# Altium PCB ESC_PCB.PcbDoc
Units mm, origin at the board's own origin, x right, y up, seen from the top; angles counter-clockwise.
Board outline 52 x 30 mm, 4 copper layers (Top Layer, Layer 1, Layer 2, Bottom Layer), stack 0.603 mm thick; 62 components, 56 nets, 202 pads, 153 vias.
Unrouted connection lines stored in the file: 4.
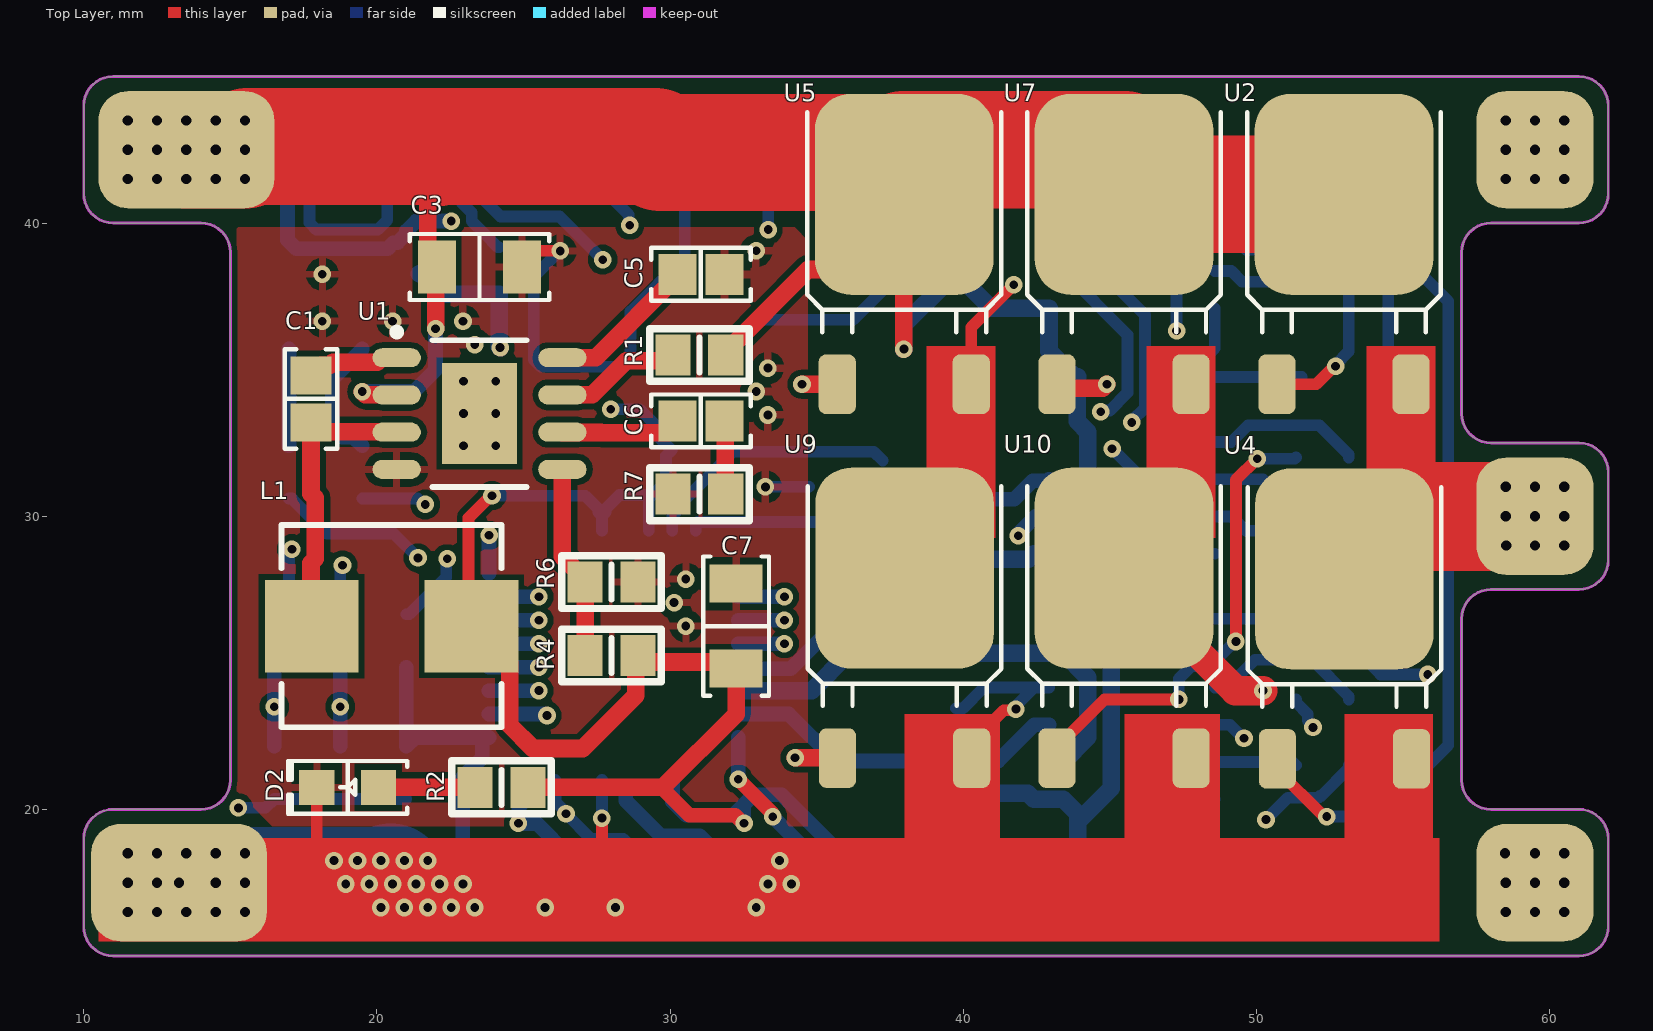
[diagram p0: Top Layer view]
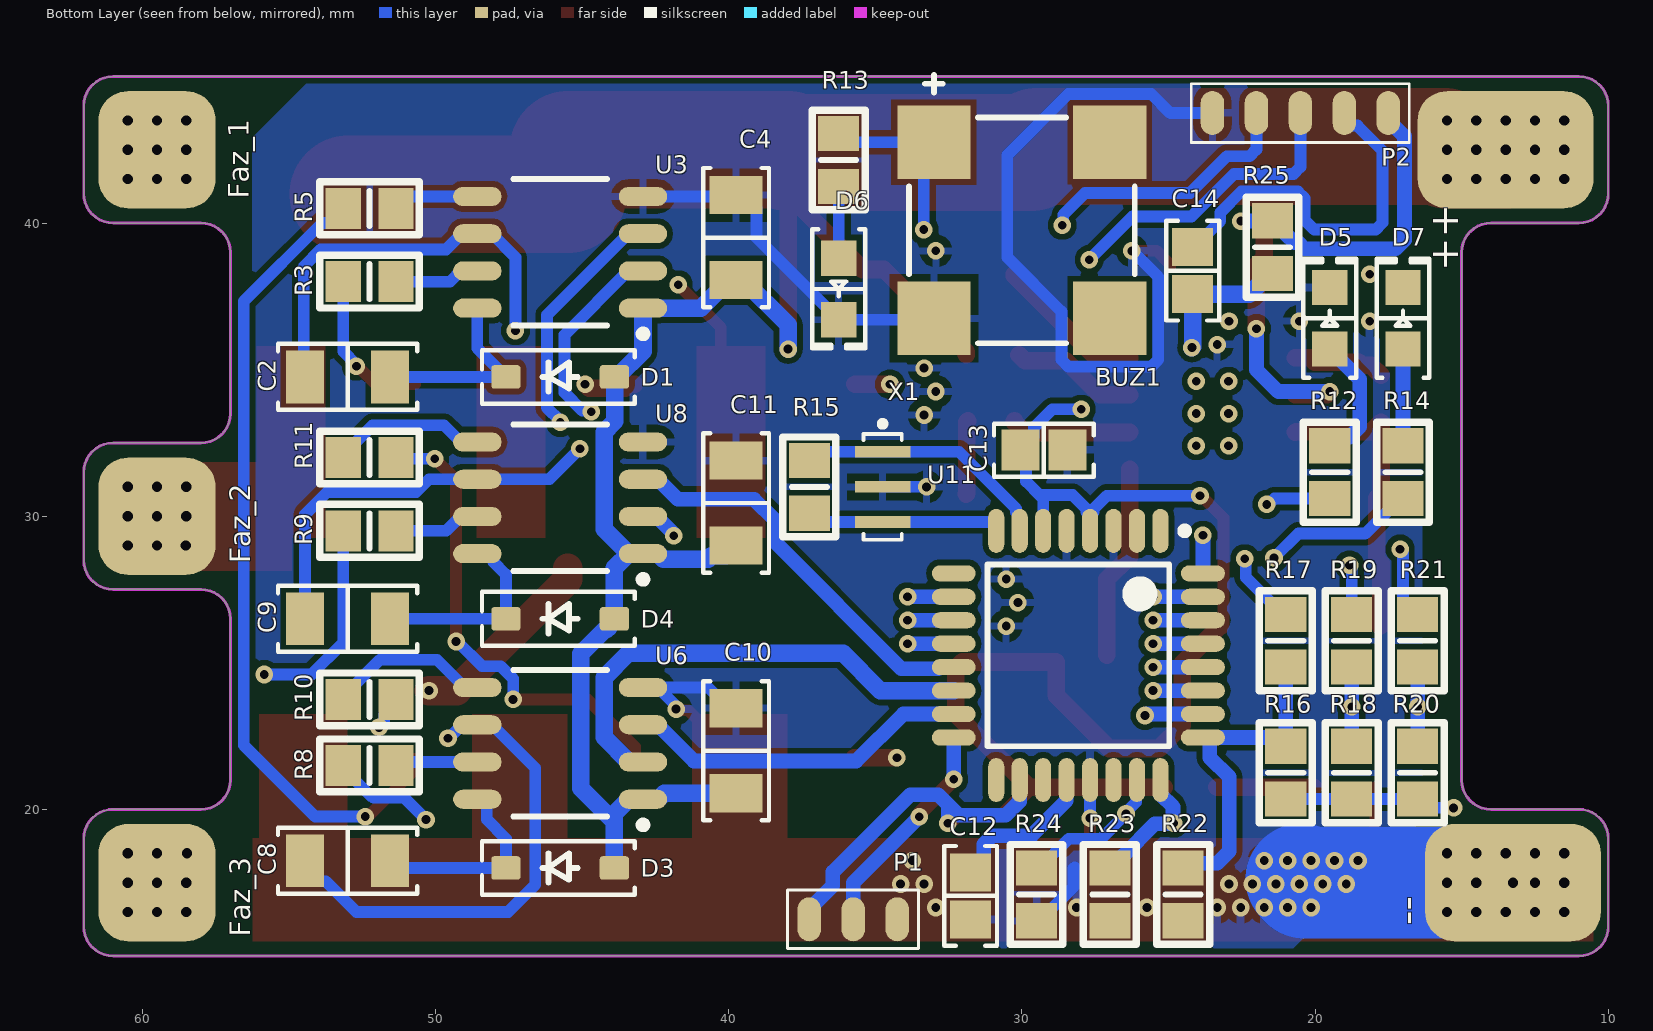
[diagram p1: Bottom Layer view, seen from below]
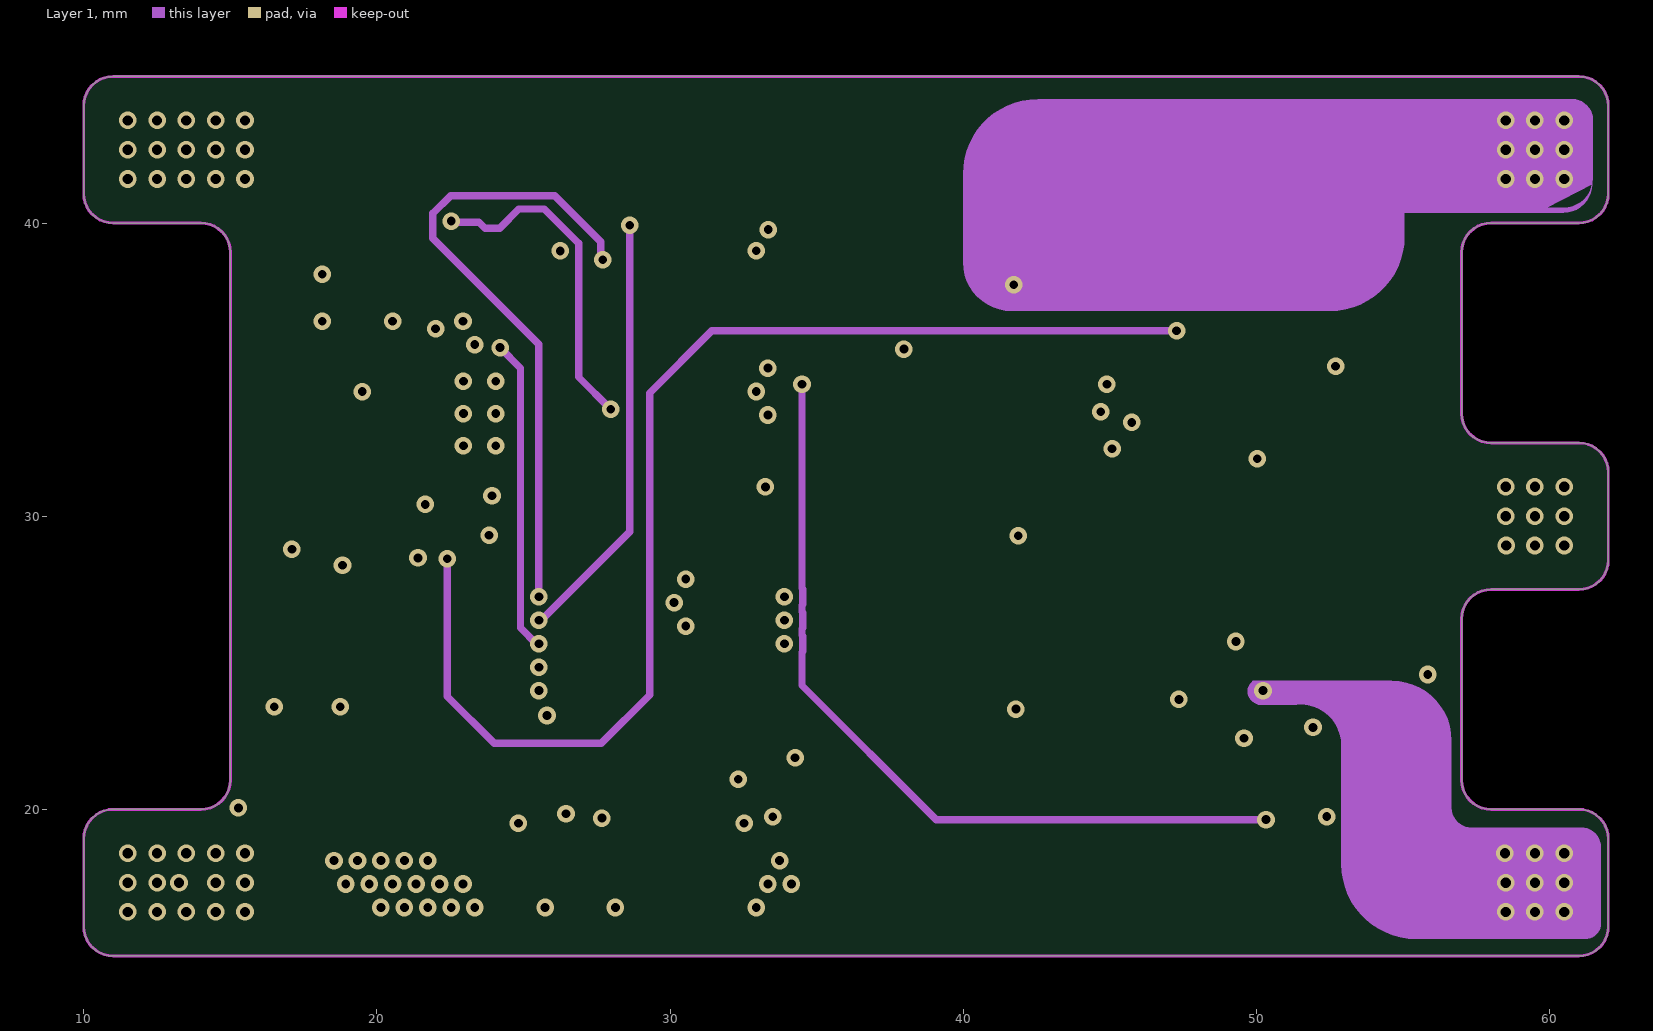
[diagram p2: Layer 1]
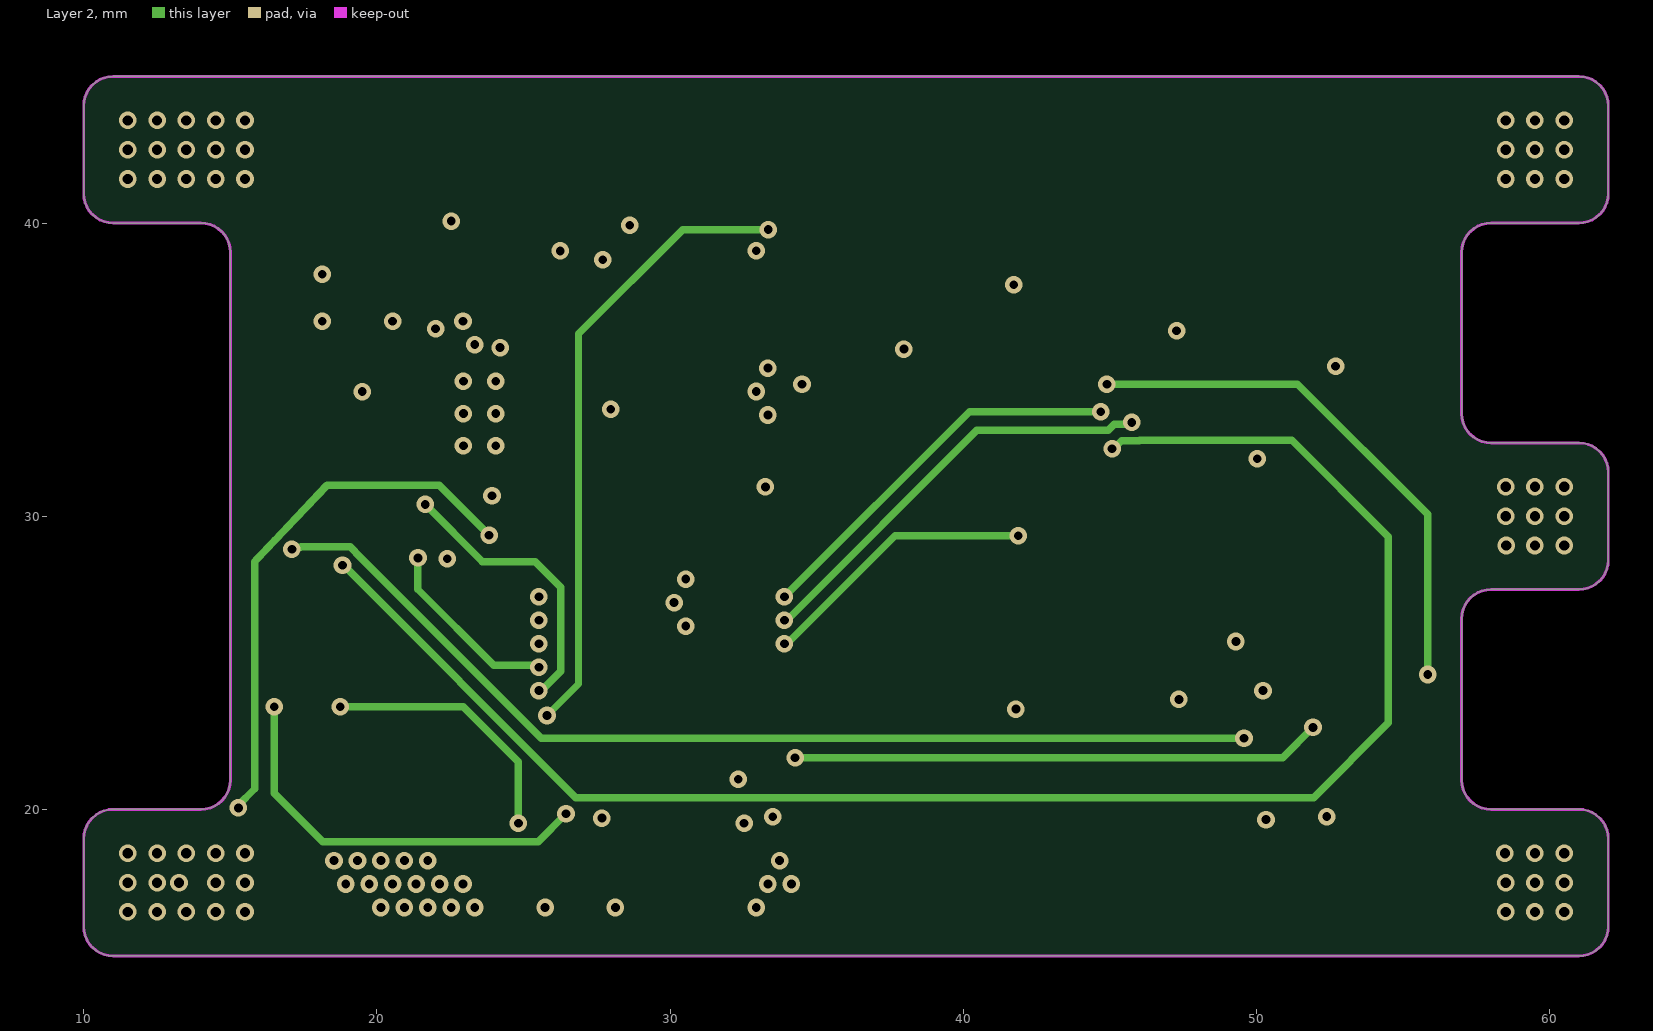
[diagram p3: Layer 2]
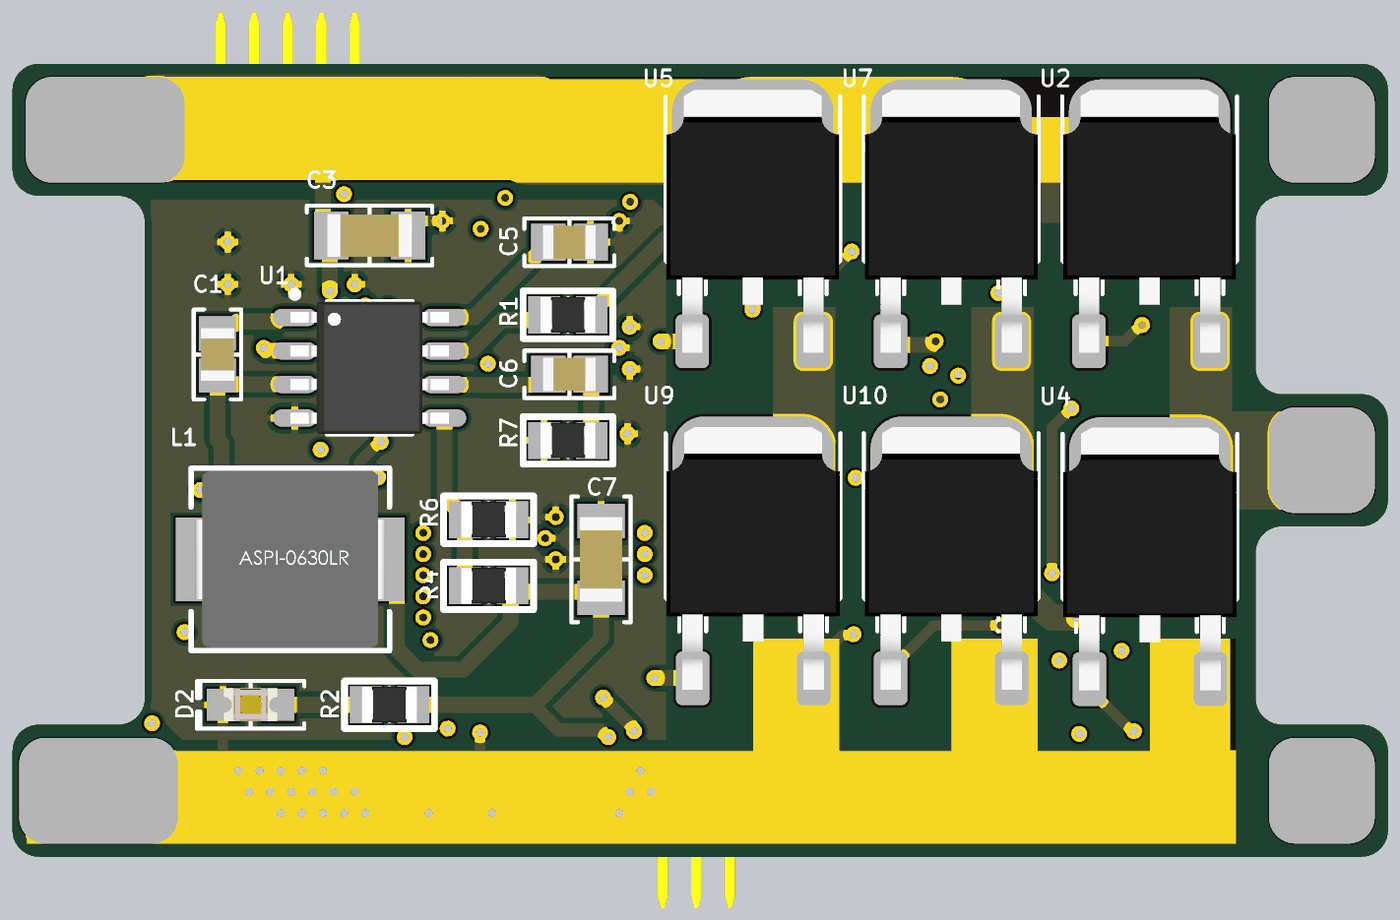
[diagram p4: 3D render of the assembled board from above, using the file's embedded part models]
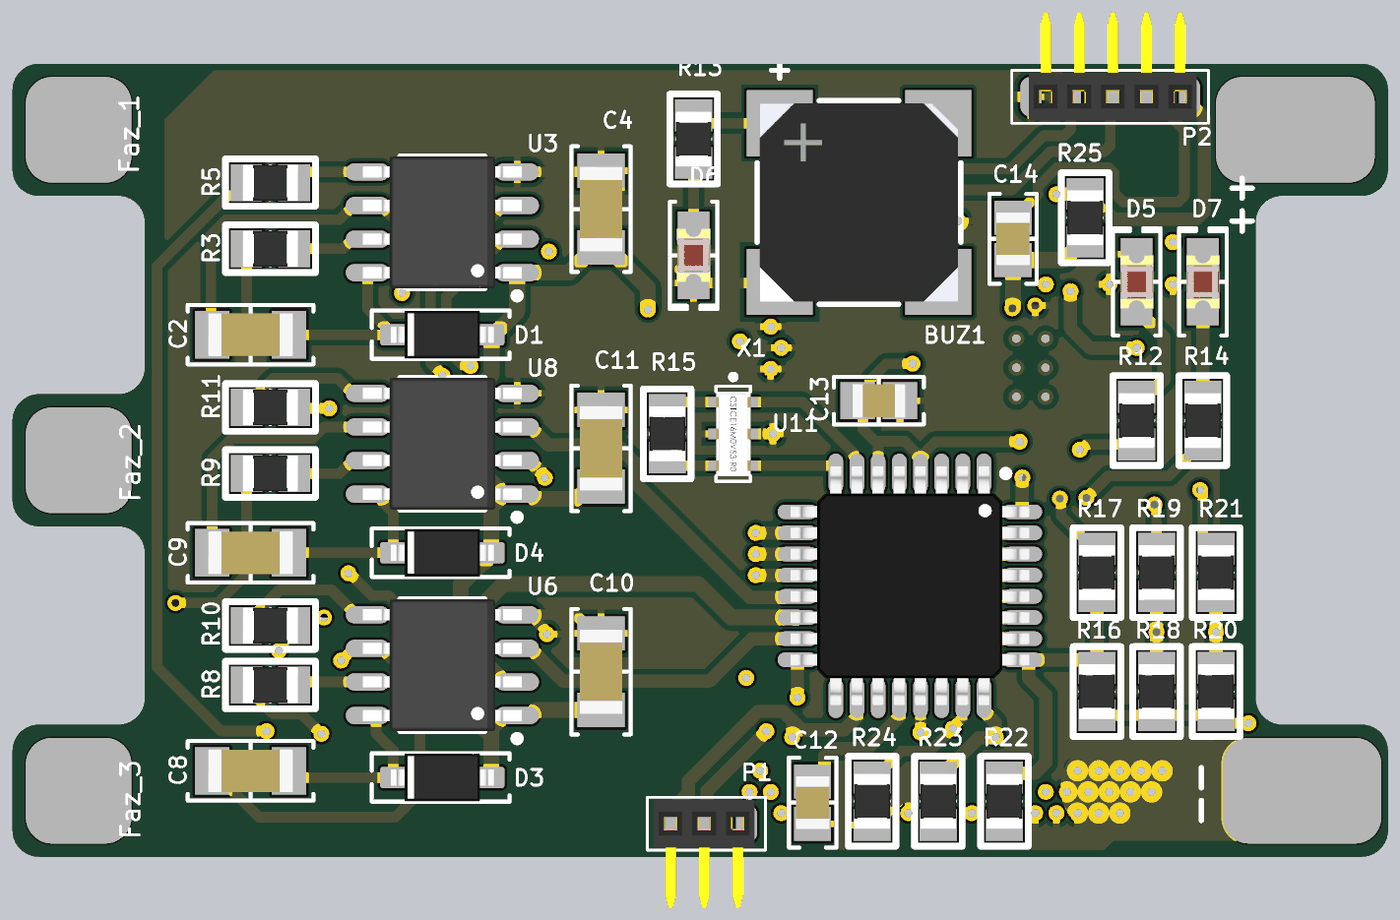
[diagram p5: 3D render of the assembled board from below, using the file's embedded part models]

## Layer stack, top to bottom
Top Solder: solder mask 0.0102, Solder Resist, Dk 3.5
Top Layer: signal copper 0.0356
Dielectric 2: prepreg 0.0711, PP-006, Dk 4.1
Layer 1: signal copper 0.035
Dielectric 1: dielectric 0.32, FR-4, Dk 4.8
Layer 2: signal copper 0.035
Dielectric 3: prepreg 0.0711, PP-006, Dk 4.1
Bottom Layer: signal copper 0.0356
Bottom Solder: solder mask 0.0102, Solder Resist, Dk 3.5

## Board outline
10,16 10,19 cw(c11,19) 11,20 14,20 ccw(c14,21) 15,21 15,39 ccw(c14,39) 14,40 11,40 cw(c11,41) 10,41 10,44 cw(c11,44) 11,45 61,45 cw(c61,44) 62,44 62,41 cw(c61,41) 61,40 58,40 ccw(c58,39) 57,39 57,33.5 ccw(c58,33.5) 58,32.5 61,32.5 cw(c61,31.5) 62,31.5 62,28.5 cw(c61,28.5) 61,27.5 58,27.5 ccw(c58,26.5) 57,26.5 57,21 ccw(c58,21) 58,20 61,20 cw(c61,19) 62,19 62,16 cw(c61,16) 61,15 11,15 cw(c11,16)

## Design rules (kind name [scope] priority, off if disabled: settings)
Clearance [All] p1: gap=0.2 ignorepadtopadclearanceinfootprint=FALSE
PolygonConnect [All] p1: connectstyle=Relief reliefconductorwidth=0.254 reliefentries=4 polygonreliefangle="90 Angle" airgapwidth=0.254
RoutingVias [All] p1: holewidth=0.3 width=0.6 viastyle="Through Hole" minholewidth=0.25 minwidth=0.5 maxholewidth=2.5 maxwidth=5
SolderMaskExpansion [All] p1: expansion=0.102 istentingtop=FALSE
Width [All] p1: maxlimit=10 minlimit=0.1 preferedwidth=0.3 midlayer1_minwidth=0.254 midlayer1_maxwidth=0.254 midlayer1_prefwidth=0.254 midlayer2_minwidth=0.254 midlayer2_maxwidth=0.254 midlayer2_prefwidth=0.254 minimp=50.000000 maximp=50.000000 favimp=50.000000
30 further rules are at their usual default settings.

## Classes and differential pairs
component class Power: C1 C2 C3 C4 C5 C6 C7 C8 C9 C10 C11 D1 D2 D3 D4 L1 R1 R2 R3 R4 R5 R6 R7 R8 R9 R10 R11 U1 U2 U3 U4 U5 U6 U7 U8 U9 U10
component class MCU: BUZ1 C12 C13 C14 D5 D6 D7 P1 P2 R12 R13 R14 R15 R16 R17 R18 R19 R20 R21 R22 R23 R24 R25 U11 X1

## Components (designator, comment, footprint, x,y, rotation, side; value= is the part's Value field where it differs from the comment)
BUZ1 "BUZZER MAGN 3.6V 7.5X7.5MM SMD" "BUZ: CMT-7525" 30,39.75 r270 bottom
C1 "CAP CER 10000PF 50V X7R 0805" "CAP 0805/2012" 17.75,34 r270 top
C2 "CAP CER 2.2UF 50V X5R 1206" "CAP 1206/3216" 53,34.75 r0 bottom
C3 "CAP CER 10UF 50V X5R 1206" "CAP 1206/3216" 23.5,38.5 r180 top
C4 "CAP CER 10UF 50V X5R 1206" "CAP 1206/3216" 39.75,39.5 r270 bottom
C5 "CAP CER 0.1UF 50V X7R 0805" "CAP 0805/2012" 31.052,38.25 r180 top
C6 "CAP CER 3900PF 50V X7R 0805" "CAP 0805/2012" 31.052,33.25 r180 top
C7 "CAP CERAMIC 22UF 16V X7S 20% PAD" "CAP 1206/3216" 32.25,26.25 r270 top
C8 "CAP CER 2.2UF 50V X5R 1206" "CAP 1206/3216" 53,18.25 r0 bottom
C9 "CAP CER 2.2UF 50V X5R 1206" "CAP 1206/3216" 53,26.5 r0 bottom
C10 "CAP CER 10UF 50V X5R 1206" "CAP 1206/3216" 39.75,22 r270 bottom
C11 "CAP CER 10UF 50V X5R 1206" "CAP 1206/3216" 39.75,30.45 r270 bottom
C12 "CAP CER 0.1UF 50V X7R 0805" "CAP 0805/2012" 31.75,17.048 r90 bottom
C13 "CAP CER 0.1UF 50V X7R 0805" "CAP 0805/2012" 29.25,32.25 r0 bottom
C14 "CAP CER 0.1UF 50V X7R 0805" "CAP 0805/2012" 24.175,38.375 r270 bottom
D1 "1N4148 Diyot" SOD-123 45.75,34.75 r0 bottom
D2 "Red 645nm LED Indication - Discrete 1.8V 0805" "SMD: LED 0805/2012 RED" 19,20.75 r180 top
D3 "1N4148 Diyot" SOD-123 45.75,18 r0 bottom
D4 "1N4148 Diyot" SOD-123 45.75,26.5 r0 bottom
D5 "Red 645nm LED Indication - Discrete 1.8V 0805" "SMD: LED 0805/2012 RED" 19.5,36.75 r90 bottom
D6 "Red 645nm LED Indication - Discrete 1.8V 0805" "SMD: LED 0805/2012 RED" 36.25,37.75 r270 bottom
D7 "Red 645nm LED Indication - Discrete 1.8V 0805" "SMD: LED 0805/2012 RED" 17,36.75 r90 bottom
L1 "FIXED IND 10UH 4A 68 MOHM SMD" ASPI-0630LR-100M-T15 20.5,26.25 r0 top
P1 "WR-PHD 2.54 mm Angled Socket Header" PWM_CONN 35.75,16.25 r180 bottom
P2 "WR-PHD 2.54 mm Angled Socket Header" TTL_CONN_5 20.5,43.75 r0 bottom
R1 "RES SMD 100K OHM 1% 1/8W 0805" RES_0805 31,35.5 r0 top
R2 "RES SMD 100 OHM 1% 1/8W 0805" RES_0805 24.25,20.75 r180 top
R3 "RES SMD 100 OHM 1% 1/8W 0805" RES_0805 52.25,38 r0 bottom
R4 "RES SMD 44.2K OHM 1% 1/8W 0805" RES_0805 28,25.25 r0 top
R5 "RES SMD 100 OHM 1% 1/8W 0805" RES_0805 52.25,40.5 r0 bottom
R6 "RES SMD 10K OHM 1% 1/8W 0805" RES_0805 28,27.75 r180 top
R7 "RES SMD 6.8K OHM 1% 1/8W 0805" RES_0805 31,30.75 r0 top
R8 "RES SMD 100 OHM 1% 1/8W 0805" RES_0805 52.25,21.5 r0 bottom
R9 "RES SMD 100 OHM 1% 1/8W 0805" RES_0805 52.25,29.5 r0 bottom
R10 "RES SMD 100 OHM 1% 1/8W 0805" RES_0805 52.25,23.75 r180 bottom
R11 "RES SMD 100 OHM 1% 1/8W 0805" RES_0805 52.25,32 r180 bottom
R12 "RES SMD 100 OHM 1% 1/8W 0805" RES_0805 19.5,31.5 r90 bottom
R13 "RES SMD 100 OHM 1% 1/8W 0805" RES_0805 36.25,42.15 r90 bottom
R14 "RES SMD 100 OHM 1% 1/8W 0805" RES_0805 17,31.5 r90 bottom
R15 "RES SMD 10K OHM 1% 1/8W 0805" RES_0805 37.25,31 r270 bottom
R16 "RES SMD 33K OHM 1% 1/8W 0805" RES_0805 21,21.25 r90 bottom
R17 "RES SMD 33K OHM 1% 1/8W 0805" RES_0805 21,25.75 r90 bottom
R18 "RES SMD 33K OHM 1% 1/8W 0805" RES_0805 18.75,21.25 r90 bottom
R19 "RES SMD 33K OHM 1% 1/8W 0805" RES_0805 18.75,25.75 r90 bottom
R20 "RES SMD 33K OHM 1% 1/8W 0805" RES_0805 16.5,21.25 r90 bottom
R21 "RES SMD 33K OHM 1% 1/8W 0805" RES_0805 16.5,25.75 r90 bottom
R22 "RES SMD 10K OHM 1% 1/8W 0805" RES_0805 24.5,17.1 r90 bottom
R23 "RES SMD 10K OHM 1% 1/8W 0805" RES_0805 27,17.1 r90 bottom
R24 "RES SMD 10K OHM 1% 1/8W 0805" RES_0805 29.5,17.1 r90 bottom
R25 "RES SMD 10K OHM 1% 1/8W 0805" RES_0805 21.45,39.175 r90 bottom
U1 "IC REG BUCK ADJUSTABLE 3A 8SOIC" SOIC8_PAD 23.5,33.5 r0 top
U2 "MOSFET N-CH 30V 161A DPAK" DPAK 53,38.5 r90 top
U3 "IC GATE DRVR HALF-BRIDGE 8SOIC" SOIC8 45.75,39 r0 bottom
U4 "MOSFET N-CH 30V 161A DPAK" DPAK 53.014,25.723 r90 top
U5 "MOSFET N-CH 30V 161A DPAK" DPAK 38,38.5 r90 top
U6 "IC GATE DRVR HALF-BRIDGE 8SOIC" SOIC8 45.75,22.25 r0 bottom
U7 "MOSFET N-CH 30V 161A DPAK" DPAK 45.5,38.5 r90 top
U8 "IC GATE DRVR HALF-BRIDGE 8SOIC" SOIC8 45.75,30.625 r0 bottom
U9 "MOSFET N-CH 30V 161A DPAK" DPAK 38.014,25.75 r90 top
U10 "MOSFET N-CH 30V 161A DPAK" DPAK 45.5,25.75 r90 top
U11 "IC MCU 8BIT 32KB FLASH 32TQFP" TQFP32 28.075,25.25 r270 bottom
X1 "CERAMIC RES 16.0000MHZ 15PF SMD" CRYSTAL_16MHZ(CTSE16) 34.75,31 r270 bottom

## Footprints (in the part's own frame and the unit in brackets; to place one, negate y for a bottom-side part, rotate by r counter-clockwise, add the part's x,y. Pads: shape width x height; smd on the part's side, far side on the other; paste and mask are expansions set on the pad)
ASPI-0630LR-100M-T15 [mm]
  rect 3.2x3.15 smd: 1(-2.725,0) 2(2.725,0)
  silkscreen extent -3.75,-3.45 3.75,3.45, body extent -3.6,-3.32 3.6,3.33, height 3
"BUZ: CMT-7525" [mm]
  rect 2.5x2.5 smd: 0(-3,3) 0(3,3) 1(-3,-3) 2(3,-3)
  silkscreen extent -5.3,-3.85 3.85,3.85, body extent -3.75,-3.75 3.75,3.75, height 2.5
"CAP 0805/2012" [mm] "Chip Capacitor, 2-Leads, Body 2.00x1.20mm, IPC Medium Density"
  rect 1.3x1.4 smd: 1(-0.8,0) 2(0.8,0)
  silkscreen extent -1.7,-0.9 1.7,0.9, body extent -1,-0.64 1,0.64, height 1.26
"CAP 1206/3216" [mm] "Chip Capacitor, 2-Leads, Body 3.25x1.60mm, IPC Medium Density"
  rect 1.3x1.8 smd: 1(-1.45,0) 2(1.45,0)
  silkscreen extent -2.37,-1.12 2.37,1.12, body extent -1.6,-0.81 1.6,0.81, height 1.62
CRYSTAL_16MHZ(CTSE16) [mm]
  rect 0.4x1.9 smd: 1(-1.2,0) 2(0,0) 3(1.2,0)
  silkscreen extent -2.25,-0.65 1.8,0.65, body extent -1.6,-0.65 1.6,0.65, height 0.9
DPAK [mil] "D-PAK, 3-Pads, Body 6,47x6,54mm (max), IPC Medium Density"
  rrect40% 80x50 smd: 1(-157.48,90.55) 3(-157.48,-89.45)
  rrect40% 270x240 smd: 4(97.52,0.55)
  silkscreen extent -87,-129 208,131, body extent -174,-128 217,129, height 91
PWM_CONN [mm]
  oval 0.8x1.5 smd: 1(-1.5,0) 2(0,0) 3(1.5,0)
  silkscreen extent -2.25,-1 2.22,1, body extent -2.01,-3.2 1.8,0.9, height 4.72
RES_0805 [mm]
  rect 1.2x1.4 smd: 1(-0.9,0) 2(0.9,0)
  silkscreen extent -1.7,-0.9 1.7,0.9, body extent -1.05,-0.68 1.05,0.68, height 0.6
"SMD: LED 0805/2012 RED" [mm] "Chip Diode, 2-Leads, Body 2.00x1.25mm, IPC Medium Density"
  rect 1.2x1.2 smd: 1(-1.05,0) 2(1.05,0)
  silkscreen extent -2.03,-0.9 2.03,0.9, body extent -1,-0.62 1,0.63, height 0.9
SOD-123 [mm] "SOD, 2-Leads, Body 1.55x3.70mm, IPC Medium Density"
  rrect25% 1x0.8 smd: 1(-1.85,0) 2(1.85,0)
  silkscreen extent -2.54,-0.92 2.67,0.92, body extent -1.95,-0.9 1.95,0.9, height 1.18
SOIC8 [mm] "SOIC, 8-Leads, Body 4,90x3,90mm, Pitch 1,27mm, Thermal Pad 3,45x2,56mm, IPC Low Density"
  oval 1.65x0.65 smd: 1(-2.825,1.905) 2(-2.825,0.635) 3(-2.825,-0.635) 4(-2.825,-1.905) 5(2.825,-1.905) 6(2.825,-0.635) 7(2.825,0.635) 8(2.825,1.905)
  silkscreen extent -2.95,-2.5 1.6,2.9, body extent -3,-2.5 3,2.5, height 1.7
SOIC8_PAD [mm] "SOIC, 8-Leads, Body 4,90x3,90mm, Pitch 1,27mm, Thermal Pad 3,45x2,56mm, IPC Low Density"
  oval 1.65x0.65 smd: 1(-2.825,1.905) 2(-2.825,0.635) 3(-2.825,-0.635) 4(-2.825,-1.905) 5(2.825,-1.905) 6(2.825,-0.635) 7(2.825,0.635) 8(2.825,1.905)
  rect 2.56x3.45 smd: 9(0,0)
  silkscreen extent -2.95,-2.5 1.6,2.9, body extent -3,-2.5 3,2.5, height 1.7
TQFP32 [mm] "TQFP, 32-Leads, Body 7,00x7,00mm, Pitch 0,80mm, IPC Medium Density"
  oval 1.5x0.55 smd: 1(-4.25,2.8) 2(-4.25,2) 3(-4.25,1.2) 4(-4.25,0.4) 5(-4.25,-0.4) 6(-4.25,-1.2) 7(-4.25,-2) 8(-4.25,-2.8) 17(4.25,-2.8) 18(4.25,-2) 19(4.25,-1.2) 20(4.25,-0.4) 21(4.25,0.4) 22(4.25,1.2) 23(4.25,2) 24(4.25,2.8)
  oval 0.55x1.5 smd: 9(-2.8,-4.25) 10(-2,-4.25) 11(-1.2,-4.25) 12(-0.4,-4.25) 13(0.4,-4.25) 14(1.2,-4.25) 15(2,-4.25) 16(2.8,-4.25) 25(2.8,4.25) 26(2,4.25) 27(1.2,4.25) 28(0.4,4.25) 29(-0.4,4.25) 30(-1.2,4.25) 31(-2,4.25) 32(-2.8,4.25)
  silkscreen extent -4.37,-3.1 3.1,3.75, body extent -4.51,-4.51 4.51,4.51, height 1
TTL_CONN_5 [mm]
  oval 0.8x1.5 smd: 1(-3,0) 2(-1.5,0) 3(0,0) 4(1.5,0) 5(3,0)
  silkscreen extent -3.71,-1 3.72,1, body extent -3.28,-3.2 3.07,0.9, height 4.72

## Part data
BUZ1: library part Buzzer(CMT-7525-80-SMT-TR), "Buzzers Transducer, Externally Driven Magnetic 3.6V 100mA 2.73kHz 80dB @ 3.6V, 10cm Surface Mount Solder Pads", +Sicaklik=+85, -Sicaklik=-40, Cins=Buzzer, Deger=Buzzer, Kılıf=Nonstandard, Lehim Yöntemi=SMD, MSL="1 (Unlimited)", Uretici Kodu=CMT-7525-80-SMT-TR
C1: library part "10nF 50V 0805", "10000pF ±10% 50V Ceramic Capacitor X7R 0805 (2012 Metric)", +Sicaklik=+125, -Sicaklik=-55, Cins=Kondansator, Deger="10nF 50V", Kılıf=0805, Lehim Yöntemi=SMD, MSL="1 (Unlimited)", Uretici Kodu=CL21B103KBANNNC
C2 C8 C9: library part "2.2uF 50V 1206", "2.2µF ±10% 50V Ceramic Capacitor X5R 1206 (3216 Metric)", +Sicaklik=+85, -Sicaklik=-55, Cins=Kondansator, Deger="2.2uF 50V", Kılıf=1206, Lehim Yöntemi=SMD, MSL="1 (Unlimited)", Uretici Kodu=CL31A225KBHNNNE
C3 C4 C10 C11: library part "10uF 50V 1206", "10µF ±10% 50V Ceramic Capacitor X5R 1206 (3216 Metric)", +Sicaklik=+125, -Sicaklik=-55, Cins=Kondansator, Deger="10uF 50V", Kılıf=1206, Lehim Yöntemi=SMD, MSL="1 (Unlimited)", Uretici Kodu=CL31A106KBHNNNE
C5 C12 C13 C14: library part "100nF 50V 0805", "0.1µF ±10% 50V Ceramic Capacitor X7R 0805 (2012 Metric)", +Sicaklik=+125, -Sicaklik=-55, Cins=Kondansator, Deger="100nF 50V", Kılıf=0805, Lehim Yöntemi=SMD, MSL="1 (Unlimited)", Uretici Kodu=CL21B104KBCNNNC
C6: library part "3.9nF 50V 0805", "3900pF ±10% 50V Ceramic Capacitor X7R 0805 (2012 Metric)", +Sicaklik=+125, -Sicaklik=-55, Cins=Kondansator, Deger="3.9nF 50V", Kılıf=0805, Lehim Yöntemi=SMD, MSL="1 (Unlimited)", Uretici Kodu=CL21B392KBANNNC
C7: library part "22uF 16V 1206", "22µF ±20% 16V Ceramic Capacitor X7S 1206 (3216 Metric)", +Sicaklik=+125, -Sicaklik=-55, Cins=Kondansator, Deger="22uF 16V", Kılıf=1206, Lehim Yöntemi=SMD, MSL="1 (Unlimited)", Uretici Kodu=GRM31CC71C226ME11L
D1 D3 D4: library part 1N4148, "DIODE GEN PURP 100V 150MA SOD123", +Sicaklik=+150, -Sicaklik=-65, Cins=Diyot, Deger=1N4148, Kılıf=SOD123, Lehim Yöntemi=SMD, MSL="1 (Unlimited)", Uretici Kodu=1N4148W-TP
D2 D5 D6 D7: library part LED_Kırmızı, "LED RED DIFFUSED 0805 SMD", +Sicaklik=+125, -Sicaklik=-40, Cins=LED, Deger="KIRMIZI LED", Kılıf=0805, Lehim Yöntemi=SMD, MSL="1 (Unlimited)", Uretici Kodu="LH R974-LP-1"
L1: library part "10uH 4A", "10µH Shielded Molded Inductor 4A 68mOhm Max Nonstandard", +Sicaklik=+125, -Sicaklik=-55, Cins=Bobin, Deger="10uH 4A", Kılıf=Nonstandard, Lehim Yöntemi=SMD, MSL="1 (Unlimited)", Uretici Kodu=ASPI-0630LR-100M-T15
P1: library part HDR(1X3), +Sicaklik=+105, -Sicaklik=-40, Cins=Konnektor, Kılıf="3POS 2.54MM", Lehim Yöntemi=MANUEL, MSL="1 (Unlimited)", Uretici Kodu=613003143121
P2: library part HDR(1X5), +Sicaklik=+105, -Sicaklik=-40, Cins=Konnektor, Kılıf="5POS 2.54MM", Lehim Yöntemi=MANUEL, MSL="1 (Unlimited)", Uretici Kodu=613005143121
R1: library part "100K 0805", "100 kOhms ±1% 0.125W, 1/8W Chip Resistor 0805 (2012 Metric) Moisture Resistant Thick Film", +Sicaklik=+155, -Sicaklik=-55, Cins=Direnc, Deger=100K, Kılıf=0805, Lehim Yöntemi=SMD, MSL="1 (Unlimited)", Uretici Kodu=RC0805FR-07100KL
R2 R3 R5 R8 R9 R10 R11 R12 R13 R14: library part "100R 0805", "100 Ohms ±1% 0.125W, 1/8W Chip Resistor 0805 (2012 Metric) Moisture Resistant Thick Film", +Sicaklik=+155, -Sicaklik=-55, Cins=Direnc, Deger=100R, Kılıf=0805, Lehim Yöntemi=SMD, MSL="1 (Unlimited)", Uretici Kodu=RC0805FR-07100RL
R4: library part "44.2K 0805", "44.2 kOhms ±1% 0.125W, 1/8W Chip Resistor 0805 (2012 Metric) Moisture Resistant Thick Film", +Sicaklik=+155, -Sicaklik=-55, Cins=Direnc, Deger=44.2K, Kılıf=0805, Lehim Yöntemi=SMD, MSL="1 (Unlimited)", Uretici Kodu=RC0805FR-0744K2L
R6 R15 R22 R23 R24 R25: library part "10K 0805", "10 kOhms ±1% 0.125W, 1/8W Chip Resistor 0805 (2012 Metric) Moisture Resistant Thick Film", +Sicaklik=+155, -Sicaklik=-55, Cins=Direnc, Deger=10K, Kılıf=0805, Lehim Yöntemi=SMD, MSL="1 (Unlimited)", Uretici Kodu=RC0805FR-0710KL
R7: library part "6.8K 0805", "6.8 kOhms ±1% 0.125W, 1/8W Chip Resistor 0805 (2012 Metric) Moisture Resistant Thick Film", +Sicaklik=+155, -Sicaklik=-55, Cins=Direnc, Deger=6.8K, Kılıf=0805, Lehim Yöntemi=SMD, MSL="1 (Unlimited)", Uretici Kodu=RC0805FR-076K8L
R16 R17 R18 R19 R20 R21: library part "33K 0805", "33 kOhms ±1% 0.125W, 1/8W Chip Resistor 0805 (2012 Metric) Moisture Resistant Thick Film", +Sicaklik=+155, -Sicaklik=-55, Cins=Direnc, Deger=33K, Kılıf=0805, Lehim Yöntemi=SMD, MSL="1 (Unlimited)", Uretici Kodu=RC0805FR-0733KL
U1: library part MP2307DN, "Buck Switching Regulator IC Positive Adjustable 0.925V 1 Output 3A 8-SOIC (0.154\", 3.90mm Width) Exposed Pad", +Sicaklik=+85, -Sicaklik=-40, Cins=IC, Deger=MP2307DN, Kılıf=8-SOIC, Lehim Yöntemi=SMD, MSL="2A (4 Weeks)", Uretici Kodu=MP2307DN-LF-Z
U2 U4 U5 U7 U9 U10: library part IRLR7843, "N-Channel 30V 161A (Tc) 140W (Tc) Surface Mount D-Pak", +Sicaklik=+175, -Sicaklik=-55, Cins=MOSFET, Deger=IRLR7843TRPBF, Kılıf=DPAK(TO-252-3), Lehim Yöntemi=SMD, MSL="1 (Unlimited)", Uretici Kodu=IRLR7843TRPBF
U3 U6 U8: library part IR2101, "Half-Bridge Gate Driver IC Non-Inverting 8-SOIC", +Sicaklik=+150, -Sicaklik=-40, Cins=IC, Deger=IR2101STRPBF, Kılıf=8-SOIC, Lehim Yöntemi=SMD, MSL="2A (4 Weeks)", Uretici Kodu=IR2101STRPBF
U11: library part ATMEGA328P, "AVR AVR® ATmega Microcontroller IC 8-Bit 20MHz 32KB (16K x 16) FLASH 32-TQFP (7x7)", +Sicaklik=+85, -Sicaklik=-40, Cins=IC, Deger=ATMEGA328P, Kılıf=32-TQFP, Lehim Yöntemi=SMD, MSL="3 (168 Hours)", Uretici Kodu=RC0805FR-07100RL
X1: library part "CRYSTAL 16.0000MHZ(CSTCE16M0V53-R0)", "16MHz Ceramic Resonator Built in Capacitor 15pF ±0.3%  -20°C ~ 80°C Surface Mount", +Sicaklik=+80, -Sicaklik=-20, Cins=Kristal, Deger="16 MHZ 15PF", Kılıf=3-SMD, Lehim Yöntemi=SMD, MSL="1 (Unlimited)", Uretici Kodu=CSTCE16M0V53-R0

## Free pads (board coordinates)
  rrect50% 6x4 smd mask+0.05: ""(13.25,17.5) ""(13.5,42.5)
  rrect50% 6x4 smd far side mask+0.05: ""(13.25,17.5) ""(13.5,42.5)
  rrect50% 4x4 smd mask+0.05: ""(59.5,17.5) ""(59.5,30) ""(59.5,42.5)
  rrect50% 4x4 smd far side mask+0.05: ""(59.5,17.5) ""(59.5,30) ""(59.5,42.5)

## Via types
v1: diameter 0.6, hole 0.3, Top Layer to Bottom Layer, 89 vias
v2: diameter 0.6/0.6/0.6/0.6 (per signal layer), hole 0.35, Top Layer to Bottom Layer, 57 vias
v3: diameter 0.6, hole 0.3, Top Layer to Bottom Layer, tented both sides, 6 vias
v4: diameter 0.6/0.6/0.6/0.6 (per signal layer), hole 0.3, Top Layer to Bottom Layer, 1 vias

## Nets (pads, with @x,y where several pads share a name; then routed paths per layer and width w, separated by ;. In a path a pad name is that pad's centre, name@x,y a point inside that pad or via, vN(x,y) a via of type N, cw(c..) or ccw(c..) an arc to the next point about the centre after c; other vN are vias at no path point)
+5V: C7.2 C13.2 L1.2 P1.1 P2.1 R2.1 R4.2 R25.2 U11.4 U11.6 U11.18 | length 77.7
  Top Layer w0.4: L1.2 23.125,26.35 23.125,29.944 23.881,30.7 v1(23.925,30.7)
  Top Layer w0.5: 29.7,20.75 30.65,19.8 32.223,19.8 32.498,19.525 v1(32.525,19.525)
  Top Layer w0.6: L1.2 23.25,26.25 24.525,24.975 24.525,22.875 25.325,22.075 27.025,22.075 28.835,23.885 28.835,25.025 32.025,25.025 C7.2 32.25,23.25 29.75,20.75 R2.1
  Layer 1 w0.254: v1(22.534,40.066) 22.576,40.024 23.481,40.024 23.687,39.818 24.183,39.818 24.843,40.477 25.71,40.477 26.877,39.31 26.877,34.748 v1(27.975,33.65)
  Bottom Layer w0.4: v1(23.925,30.7) 27.105,30.7 27.55,30.255 27.55,30.141 U11.4@27.675,30.016 ; U11.4 U11.4@27.675,30.016 ; v1(27.975,33.65) 28.966,33.65 29.6,33.016 29.6,32.7 C13.2 29.859,32.059 29.859,31.184 29.394,30.719 ; U11.6 29.275,30.6 29.394,30.719 ; U11.4@27.675,30.016 27.8,30.141 27.8,30.255 28.265,30.719 29.394,30.719
  Bottom Layer w0.5: P2.1 17.5,43.481 17.269,43.25 17.243,43.25 16.95,42.957 16.95,40.899 16.95,39.418 17.243,39.125 20.364,39.125 20.564,39.325 20.7,39.325 21,39.625 21,39.725 21.35,40.075 R25.2 ; R25.2@21.54,40.066 v1(22.534,40.066) ; U11.18 30.085,20.99 30.085,20.265 30.55,19.8 32.161,19.8 32.511,20.15 ; v1(32.525,19.525) 32.511,19.539 32.511,20.15 ; P1.1 37.152,16.348 37.152,16.698 36.45,17.4 36.45,17.861 33.811,20.5 32.861,20.5 32.511,20.15
A0: R20.2 R21.1 R24.2 U11.23 | length 21.8
  Layer 2 w0.254: v1(16.5,23.5) 16.5,20.55 18.152,18.898 25.498,18.898 v4(26.45,19.85)
  Bottom Layer w0.4: U11.23 26.104,20.971 26.104,20.25 26.45,19.904 v4(26.45,19.85) 27.3,19 28.4,19 29.4,18 R24.2
  Bottom Layer w0.5: R20.2 v1(16.5,23.5) R21.1
A1: R18.2 R19.1 R23.2 U11.24 | length 16.2
  Layer 2 w0.254: v1(18.75,23.5) 22.95,23.5 24.825,21.625 v1(24.825,19.525)
  Bottom Layer w0.5: R18.2 v1(18.75,23.5) R19.1 ; U11.24 25.275,20.511 24.844,20.081 24.844,19.544 v1(24.825,19.525) 24.844,19.506 25.469,19.506 26.55,18.425 26.55,18.35 26.9,18 R23.2
A2: R16.2 R17.1 R22.2 U11.25 | length 11.8
  Bottom Layer w0.5: R17.1 R16.2 21.3,22.45 23.386,22.45 U11.25 ; U11.25@23.802,22.45 23.611,22.45 23.588,22.427 23.588,21.763 22.932,21.107 22.932,18.568 23.343,18.157 24.343,18.157 R22.2
BUZZER: BUZ1.1 R13.2 U11.26 | length 29.9
  Layer 2 w0.254: v1(25.8,23.2) 26.875,24.275 26.875,36.225 30.425,39.775 v1(33.35,39.775)
  Bottom Layer w0.4: v1(33.35,39.775) 33.35,42.4 BUZ1.1 35.95,42.75 R13.2
  Bottom Layer w0.5: U11.26 25.75,23.25 v1(25.8,23.2)
DTR: C14.1 P2.2 | length 12.9
  Bottom Layer w0.4: P2.2 19,43.508 18.815,43.323 18.555,43.323 17.7,42.469 17.7,40.009 17.934,39.775 20.025,39.775 20.35,40.1 20.35,40.841 20.584,41.075 22.515,41.075 23.234,40.356 23.234,40.066 23.675,39.625 24.125,39.175 C14.1
GND: BUZ1.2 C3.1 C4.1 C5.1 C7.1 C10.1 C11.1 C12.1 C13.1 D2.2 D5.2 D6.2 D7.2 P1.3 P2.5 pad.@13.25,17.5 R6.1 R7.1 R22.1 R23.1 R24.1 U1.4 U3.4 U4.3 U6.4 U8.4 U9.3 U10.3 U11.3 U11.5 U11.21 X1.2 | length 76.7
  Top Layer w0.4: D2.2 17.95,18.275 18.1,18.125 ; C3.1 24.95,38.6 25.4,39.05 v1(26.25,39.05) ; v1(27.675,19.7) 27.675,18.55 28.2,18.025 ; 28.337,18.163 28.55,17.95 38.2,17.95 38.2,19.664 U9.3 40.286,22.286 41.382,23.382 41.759,23.382 v1(41.797,23.42)
  Bottom Layer w0.4: v2(13.25,17.5) v2(14.5,17.5) v2(15.5,17.5) ; v1@20.475,17.625 v1@21.1,17.625 ; P2.5 24.934,43.75 25.584,44.4 28.416,44.4 30.499,42.317 30.499,38.826 28.65,36.978 28.65,35.334 28.416,35.1 25.584,35.1 25.35,35.334 25.35,38.166 26.234,39.05 v1(26.25,39.05) ; v1(27.675,19.7) U11.21 ; 28.2,18.025 28.238,17.987 28.238,17.362 29.4,16.2 R24.1 ; BUZ1.2 33.05,36.7 D6.2 39.05,39.5 39.05,40.5 39.5,40.95 C4.1 39.795,40.905 U3.4 ; v1(33.25,31) X1.2 ; C10.1 40,23.45 40.705,24.155 U6.4@42.425,24.155 ; v1(41.797,23.42) 41.85,23.473 41.85,23.58 U6.4@42.425,24.155 ; U6.4 U6.4@42.425,24.155
  Bottom Layer w3.8: v2(15.5,17.5) 20.35,17.5 v1@20.475,17.625
  other v1: 20.136,16.652 20.936,16.652 21.736,16.652 22.536,16.652 23.336,16.652 25.736,16.652 28.136,16.652 32.936,16.652 18.936,17.452 19.736,17.452 20.536,17.452 21.336,17.452 22.136,17.452 22.936,17.452 33.336,17.452 34.136,17.452 18.536,18.252 19.336,18.252 20.136,18.252 20.936,18.252 21.736,18.252 33.736,18.252 30.536,26.252 30.136,27.052 30.536,27.852 33.336,33.452 32.936,34.252 33.336,35.052 23.336,35.852 18.136,36.652 20.536,36.652 22.936,36.652 18.136,38.252 32.936,39.052
  other v2: 11.5,16.5 12.5,16.5 13.5,16.5 14.5,16.5 15.5,16.5 11.5,17.5 12.5,17.5 11.5,18.5 12.5,18.5 13.5,18.5 14.5,18.5 15.5,18.5
LED1: R12.1 U11.27 | length 13.6
  Layer 2 w0.254: v1(21.65,30.4) 23.6,28.45 25.4,28.45 26.275,27.575 26.275,24.713 25.612,24.05 v1(25.525,24.05)
  Bottom Layer w0.4: R12.1 21.396,30.6 21.596,30.4 v1(21.65,30.4)
  Bottom Layer w0.5: U11.27 v1(25.525,24.05)
LED2: R14.1 U11.28 | length 13.2
  Layer 2 w0.254: v1(21.4,28.575) 21.4,27.5 23.984,24.916 25.459,24.916 v1(25.525,24.85)
  Bottom Layer w0.4: R14.1 17.1,30.6 18.293,29.407 20.568,29.407 v1(21.4,28.575)
  Bottom Layer w0.5: U11.28 v1(25.525,24.85)
NetC1_1: C1.1 U1.1 | length 3.2
  Top Layer w0.6: C1.1 18.1,35.15 18.401,35.15 18.501,35.25 20.006,35.25 20.161,35.405 U1.1
NetC1_2: C1.2 L1.1 U1.3 | length 10.1
  Top Layer w0.6: L1.1 17.75,26.275 17.75,28.394 17.9,28.544 17.9,30.622 17.75,30.772 C1.2 18.075,32.875 20.665,32.875 U1.3
NetC2_1: C2.1 D1.2 U3.8 | length 6.7
  Bottom Layer w0.4: U3.8 48.575,35.725 D1.2 47.7,34.75 C2.1
NetC2_2: C2.2 R17.2 U3.6 | length 59
  Layer 1 w0.254: v1(22.4,28.55) 22.4,23.85 24,22.25 27.65,22.25 29.3,23.9 29.3,34.2 31.425,36.325 v1(47.275,36.325)
  Bottom Layer w0.4: R17.2 21.1,26.65 22.362,27.912 22.362,28.512 v1(22.4,28.55) ; v1(47.275,36.325) 47.275,38.835 48.075,39.635 U3.6 49.099,39.635 49.634,39.1 53.916,39.1 54.5,38.516 54.5,34.8 C2.2
NetC5_2: C5.2 U1.8 | length 5.1
  Top Layer w0.6: U1.8 27.457,35.405 30.252,38.2 C5.2
NetC6_1: C6.1 R7.2 | length 2.5
  Top Layer w0.6: C6.1 31.876,33.226 31.876,30.774 R7.2
NetC6_2: C6.2 U1.6 | length 4.1
  Top Layer w0.6: U1.6 26.335,32.855 27.638,32.855 27.644,32.85 29.902,32.85 30.252,33.2 C6.2
NetC8_1: C8.1 D3.2 U6.8 | length 6.9
  Bottom Layer w0.4: U6.8 48.371,20.345 48.255,20.23 48.255,19.657 47.6,19.001 D3.2 51.3,18 C8.1
NetC8_2: C8.2 R21.2 U6.6 | length 54.6
  Layer 2 w0.254: v1(17.1,28.875) 17.166,28.941 17.411,28.941 17.422,28.952 19.085,28.952 19.452,28.585 25.612,22.425 v1(49.575,22.425)
  Bottom Layer w0.4: R21.2 16.6,26.65 17,27.05 17,28.721 17.1,28.821 v1(17.1,28.875) ; v1(49.575,22.425) 49.555,22.425 49.095,22.885 48.075,22.885 46.6,21.41 46.6,17.425 47.525,16.5 52.7,16.5 53.75,17.55 54,17.55 54.45,18 C8.2
NetC9_1: C9.1 D4.2 U8.8 | length 6.8
  Bottom Layer w0.4: U8.8 48.143,28.72 48.027,28.605 48.027,28.438 47.6,28.011 D4.2 C9.1
NetC9_2: C9.2 R19.2 U8.6 | length 72.8
  Layer 2 w0.254: v1(18.825,28.325) 18.862,28.325 26.789,20.398 51.948,20.398 54.498,22.948 54.498,29.302 51.213,32.587 46.024,32.587 46.01,32.573 45.397,32.573 45.124,32.3 v1(45.075,32.3)
  Bottom Layer w0.4: R19.2 18.75,28.196 18.825,28.271 v1(18.825,28.325) ; v1(45.075,32.3) 46.115,31.26 U8.6 50.224,31.26 50.659,30.825 53.691,30.825 54.45,30.066 C9.2
NetC12_2: C12.2 U11.20 | length 5.1
  Bottom Layer w0.5: U11.20@28.485,20.74 28.485,20.29 29.675,19.1 31.007,19.1 31.3,18.807 31.3,18.248 31.7,17.848 C12.2
NetD2_1: D2.1 R2.2 | length 3.3
  Top Layer w0.6: D2.1 R2.2
NetD5_1: D5.1 R12.2 | length 4.4
  Bottom Layer w0.5: R12.2 19.2,32.7 18.826,32.7 18.475,33.051 18.475,34.675 D5.1
NetD6_1: D6.1 R13.1 | length 2.4
  Bottom Layer w0.4: D6.1 R13.1
NetD7_1: D7.1 R14.2 | length 3.3
  Bottom Layer w0.5: R14.2 D7.1
NetR1_1: R1.1 U1.7 | length 4.3
  Top Layer w0.6: U1.7 26.335,34.145 27.338,34.145 28.499,35.305 29.905,35.305 R1.1
NetR3_1: R3.1 U3.7 | length 2.9
  Bottom Layer w0.4: U3.7 49.143,38.365 49.508,38 R3.1
NetR3_2: R3.2 U2.1 | length 5.3
  Top Layer w0.4: U2.1 52.042,34.5 52.656,35.114 v1(52.7,35.114)
  Bottom Layer w0.4: v1(52.7,35.114) 52.7,35.169 53.15,35.619 R3.2
NetR4_1: R4.1 R6.2 U1.5 | length 6.7
  Top Layer w0.6: U1.5 26.325,28.625 27.1,27.85 R6.2 R4.1
NetR5_1: R5.1 U3.5 | length 2.9
  Bottom Layer w0.4: U3.5 50.95,40.905 51.35,40.505 R5.1
NetR5_2: R5.2 U4.1 | length 27.8
  Top Layer w0.4: U4.1 50.714,21.342 52.265,19.791 52.359,19.791 v1(52.397,19.753)
  Bottom Layer w0.4: v1(52.397,19.753) 54.103,19.753 56.54,22.19 56.54,37.333 53.874,40 53.55,40 53.15,40.4 R5.2
NetR8_1: R8.1 U6.7 | length 2.8
  Bottom Layer w0.4: U6.7 51.235,21.615 R8.1
NetR8_2: R8.2 U5.1 | length 32.9
  Top Layer w0.6: v1(34.5,34.5) U5.1
  Layer 1 w0.254: v1(34.5,34.5) 34.5,27.537 34.527,27.51 34.527,26.99 34.5,26.963 34.5,26.737 34.527,26.71 34.527,26.19 34.5,26.163 34.5,25.937 34.527,25.91 34.527,25.39 34.5,25.363 34.5,24.225 39.075,19.65 v1(50.325,19.65)
  Bottom Layer w0.4: v1(50.325,19.65) 51.075,20.4 52.116,20.4 52.169,20.453 52.203,20.453 53.15,21.4 R8.2
NetR9_1: R9.1 U8.7 | length 3
  Bottom Layer w0.4: U8.7 49.143,29.99 49.633,29.5 R9.1
NetR9_2: R9.2 U7.1 | length 27
  Top Layer w0.6: U7.1 43.399,34.5 43.535,34.364 44.764,34.364 v1(44.9,34.5)
  Layer 2 w0.254: v1(44.9,34.5) 51.4,34.5 55.84,30.06 v1(55.84,24.6)
  Bottom Layer w0.4: R9.2 53.15,25.684 54.234,24.6 v1(55.84,24.6)
NetR10_1: R10.1 U6.5 | length 5.6
  Bottom Layer w0.4: U6.5 49.007,24.155 49.952,25.1 51.9,25.1 53.15,23.85 R10.1
NetR10_2: R10.2 U9.1 | length 20.7
  Top Layer w0.6: v1(34.262,21.763) 35.701,21.763 U9.1
  Layer 2 w0.254: v1(34.262,21.763) 50.896,21.763 v1(51.929,22.796)
  Bottom Layer w0.4: R10.2 51.35,23.65 51.75,23.25 51.75,23.029 51.929,22.85 v1(51.929,22.796)
NetR11_1: R11.1 U8.5 | length 5.3
  Bottom Layer w0.4: U8.5 49.143,32.53 49.713,33.1 52.15,33.1 53.15,32.1 R11.1
NetR11_2: R11.2 U10.1 | length 16.3
  Top Layer w0.4: U10.1 43.2,22.131 44.819,23.75 v1(47.356,23.75) ; v1(49.3,25.725) 49.3,31.235 v1(50.025,31.96)
  Bottom Layer w0.4: v1(47.356,23.75) 47.35,23.756 47.35,24.455 47.775,24.88 48.414,24.88 49.259,25.725 v1(49.3,25.725) ; v1(50.025,31.96) 51.31,31.96 R11.2
NetU2_3: pad.@59.5,30 U2.3 U4.4
  other v2: 58.525,29 59.5,29 60.5,29 58.5,30 59.5,30 60.5,30 58.5,31 59.5,31 60.5,31
NetU3_2: U3.2 U11.10 | length 21.7
  Layer 2 w0.254: v1(33.9,27.25) 40.214,33.564 v1(44.689,33.564)
  Bottom Layer w0.4: U3.2 43.425,38.365 45.6,36.19 45.6,34.21 44.992,33.602 44.727,33.602 v1(44.689,33.564)
  Bottom Layer w0.5: U11.10 v1(33.9,27.25)
NetU3_3: U3.3 U11.11 | length 24.5
  Layer 2 w0.254: v1(33.9,26.45) 33.987,26.45 40.464,32.927 44.939,32.927 45.146,33.134 45.684,33.134 v1(45.75,33.2)
  Bottom Layer w0.4: U3.3 43.425,39.635 46.2,36.86 46.2,33.704 45.75,33.254 v1(45.75,33.2)
  Bottom Layer w0.5: U11.11 v1(33.9,26.45)
NetU5_3: pad.@59.5,42.5 U5.3 U9.4 | length 4
  Top Layer w0.4: U5.3 40.272,36.445 v1(41.722,37.895)
  other v2: 58.5,41.5 59.5,41.5 60.5,41.5 58.5,42.5 59.5,42.5 60.5,42.5 58.5,43.5 59.5,43.5 60.5,43.5
NetU6_2: U6.2 U11.14 | length 16.5
  Bottom Layer w0.6: U11.14 34.825,24.05 36.1,25.325 43.422,25.325 44.25,24.497 44.25,22.454 43.411,21.615 U6.2
NetU6_3: U6.3 U11.15 | length 11.8
  Bottom Layer w0.5: U11.15 34.05,23.25 35.65,21.65 41.19,21.65 42.425,22.885 U6.3
NetU7_3: pad.@59.5,17.5 U7.3 U10.4 | length 6.7
  Top Layer w1: U10.4 45.486,27.846 49.282,24.05 v1(50.225,24.05)
  other v2: 58.5,16.5 59.5,16.5 60.5,16.5 58.5,17.5 59.5,17.5 60.5,17.5 58.475,18.5 59.5,18.5 60.5,18.5
NetU8_2: U8.2 U11.12 | length 12.4
  Layer 2 w0.254: v1(33.9,25.65) 33.987,25.65 37.672,29.335 v1(41.875,29.335)
  Bottom Layer w0.5: U11.12 v1(33.9,25.65) ; v1(41.875,29.335) 41.894,29.354 41.894,29.419 42.466,29.99 U8.2
NetU8_3: U8.3 U11.13 | length 13.7
  Bottom Layer w0.5: U11.13 32.814,24.85 32.864,24.8 34.111,24.8 38.4,29.089 38.4,29.836 39.139,30.575 41.74,30.575 42.376,31.211 42.876,31.211 U8.3
PD2: R16.1 R18.1 R20.1 U11.32 | length 25.5
  Layer 2 w0.254: v1(15.275,20.05) 15.275,20.144 15.825,20.694 15.825,28.454 15.897,28.53 16.508,29.172 18.297,31.05 22.125,31.05 v1(23.825,29.35)
  Bottom Layer w0.4: v1(15.275,20.05) 16.2,20.05 R20.1 ; R20.1@16.575,20.35 R18.1 R16.1
  Bottom Layer w0.5: U11.32 v1(23.825,29.35)
PWM: P1.2 U11.16 | length 7.6
  Top Layer w0.5: v1(32.325,21.025) 33.481,19.869 33.481,19.769 v1(33.5,19.75)
  Bottom Layer w0.5: v1(32.325,21.025) U11.16 ; v1(33.5,19.75) 35.75,17.5 P1.2
RESET: C14.2 R25.1 U11.29 | length 17.2
  Layer 1 w0.254: v1(24.2,35.75) 24.898,35.052 24.898,26.19 25.438,25.65 v1(25.525,25.65)
  Bottom Layer w0.5: U11.29 v1(25.525,25.65)
  Bottom Layer w0.6: R25.1 21.55,38.275 22.25,37.575 C14.2 24.175,35.775 v1(24.2,35.75)
RX: P2.4 U11.30 | length 25.6
  Layer 1 w0.254: v1(25.525,26.45) 25.612,26.45 28.625,29.463 v1(28.625,39.925)
  Bottom Layer w0.4: P2.4 22,42.509 22.234,42.275 23.012,42.275 24.262,41.025 27.846,41.025 28.587,40.284 28.587,39.963 v1(28.625,39.925)
  Bottom Layer w0.5: U11.30 v1(25.525,26.45)
TX: P2.3 U11.31 | length 33.9
  Layer 1 w0.254: v1(25.525,27.25) 25.525,35.867 21.907,39.485 21.907,40.326 22.513,40.931 26.063,40.931 27.634,39.36 27.634,38.816 v1(27.7,38.75)
  Bottom Layer w0.4: P2.3 20.5,41.909 20.734,41.675 22.763,41.675 24.213,40.225 26.225,40.225 v1(27.7,38.75)
  Bottom Layer w0.5: U11.31 v1(25.525,27.25)
VCC: C3.2 C4.2 C10.2 C11.2 D1.1 D3.1 D4.1 pad.@13.5,42.5 R1.2 U1.2 U2.4 U3.1 U5.4 U6.1 U7.4 U8.1 | length 102.9
  Top Layer w0.6: v1(19.5,34.25) 19.605,34.145 20.665,34.145 U1.2 ; v1(22,36.396) 22,38.45 C3.2 21.734,38.816 21.734,40.7 22,40.966 22,42.566 ; R1.2 31.9,35.6 34.715,38.415 35.424,38.415 U5.4@37.975,40.966 ; v1(37.975,35.698) U5.4@37.975,40.966 ; U5.4 U5.4@37.975,40.966
  Top Layer w4: v2(13.5,42.5) v2(14.5,42.5) v2(15.5,42.5) 15.606,42.606 22,42.606 ; 22,42.566 22,42.606 ; U5.4@37.975,42.406 29.68,42.406 29.48,42.606 22,42.606 ; U5.4@37.975,42.5 U7.4@45.486,42.5 ; U7.4 U2.4 ; U7.4@45.486,42.025 U7.4@46.534,40.977
  Bottom Layer w0.5: v1(19.5,34.25) 21.25,34.25 22,35 v1(22,36.396)
  Bottom Layer w0.6: v1(37.975,35.698) 37.975,36.525 39.5,38.05 C4.2 40,38.05 40.955,37.095 U3.1 42.925,35.625 D1.1@43.8,34.75 ; C10.2 42.206,20.55 42.411,20.345 U6.1 43.411,20.345 43.9,19.856 D3.1 ; C11.2 40.1,28.65 40.586,28.65 40.701,28.535 42.226,28.535 42.411,28.72 U8.1 U8.1@43.411,28.72 ; 43.9,19.575 45.05,20.725 45.05,25.305 44.23,26.125 44.174,26.125 D4.1@44.1,26.199 ; D4.1 43.9,28.231 U8.1@43.411,28.72 ; D1.1 43.889,34.739 43.889,33.233 44.25,32.872 44.25,29.559 U8.1@43.411,28.72
  other v2: 11.5,41.5 12.5,41.5 13.5,41.5 14.5,41.5 15.5,41.5 11.5,42.5 12.5,42.5 11.5,43.5 12.5,43.5 13.5,43.5 14.5,43.5 15.5,43.5
X1: R15.1 U11.7 X1.1 | length 8.8
  Bottom Layer w0.4: U11.7 30.075,30.016 30.2,30.141 30.2,30.255 32.145,32.2 X1.1 36.95,32.2 R15.1
X2: R15.2 U11.8 X1.3 | length 6.8
  Bottom Layer w0.4: U11.8 30.875,29.731 30.944,29.8 X1.3 36.95,29.8 R15.2
pads on no net: BUZ1.0 U1.9 U11.1 U11.2 U11.9 U11.17 U11.19 U11.22
copper on no net:
  other v3: 22.95,32.4 24.05,32.4 22.95,33.5 24.05,33.5 22.95,34.6 24.05,34.6

## Polygon pours and split planes (outlines as drawn)
GND on Bottom Layer "L2-No Net" (solid, remove dead copper, pour order 0): 21,45 54.15,45 56.25,42.9 56.25,17.025 54.225,15 21,15 16.35,19.65 16.35,40.35
GND on Top Layer "L2-No Net" (solid, remove dead copper, pour order 1): 15.275,39.85 34.25,39.85 34.7,39.4 34.7,19.425 16.425,19.425 15.225,20.625 15.225,39.8

## Keep-outs
Keep-Out Layer:
  the board outline again, w0.1

## Other copper
Top Layer:
  rectangle net NetU2_3: 54.9,28.125 61,31.85
  rectangle net GND: 53,15.5 56.025,23.25
  rectangle net GND: 10.5,15.5 56.25,19.025
  rectangle net NetU2_3: 53.75,29.25 56.1,35.8
  rectangle net NetU7_3: 46.25,29.25 48.6,35.8
  rectangle net NetU5_3: 38.75,29.25 41.1,35.8
  rectangle net GND: 38,15.5 41.25,23.25
  rectangle net GND: 45.5,15.5 48.75,23.25
Layer 1:
  region net NetU7_3: 61.225,15.58 ccw(c61.225,16.105) 61.75,16.105 61.75,18.705 ccw(c61.075,18.705) 61.075,19.38 57.325,19.38 cw(c57.325,20.055) 56.65,20.055 56.65,22.35 ccw(c54.62,22.35) 54.62,24.38 49.874,24.38 ccw(c50.161,24.022) 50.063,23.574 51.374,23.574 cw(c51.5,22.18) 52.9,22.18 52.9,18.12 ccw(c55.44,18.12) 55.44,15.58
  region net NetU5_3: 59.9,40.525 60.475,40.525 ccw(c60.475,41.525) 61.475,41.525 61.475,43.525 ccw(c60.775,43.525) 60.775,44.225 42.54,44.225 ccw(c42.54,41.685) 40,41.685 40,38.65 ccw(c41.65,38.65) 41.65,37 52.51,37 ccw(c52.51,39.54) 55.05,39.54 55.05,40.35 60.475,40.35 ccw(c60.475,41.325) 61.45,41.325

## Silkscreen, mask and mechanical layers (free items; w line width, h text height)
Bottom Overlay:
  text "Faz_1" at 56.375,40.825 h0.7 r270
  text "++" at 15.975,38.35 h1 r90
  text "Faz_2" at 56.325,28.4 h0.7 r270
  text "--" at 17.15,16.05 h1 r90
  text "Faz_3" at 56.325,15.65 h0.7 r270
Top Solder:
  rectangle: 38,15.5 41.25,23.25
  rectangle: 10.55,15.475 56.3,19
  rectangle: 45.5,15.5 48.75,23.25
  rectangle: 53,15.5 56.25,23.25
  lines w4: 14.5,42.5 15.5,42.5 22,42.5 51.844,42.5